# Altium PCB uCurrentRev5_B.PcbDoc
Units mm, origin at the board's own origin, x right, y up, seen from the top; angles counter-clockwise.
Board outline 38 x 36 mm, 2 copper layers (Top Layer, Bottom Layer); 4 components, 0 nets, 2 pads, 0 vias.
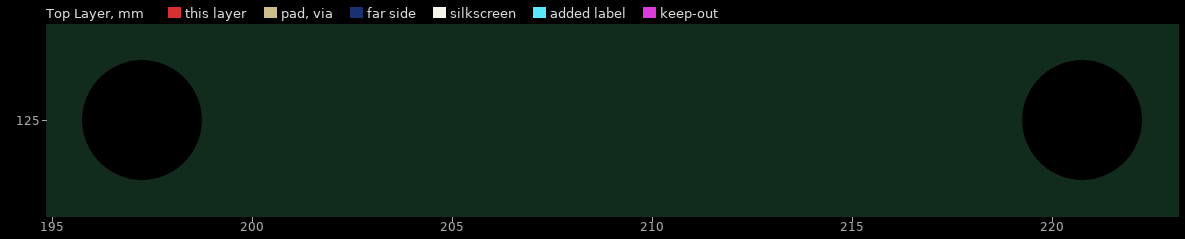
[diagram p0: Top Layer view]
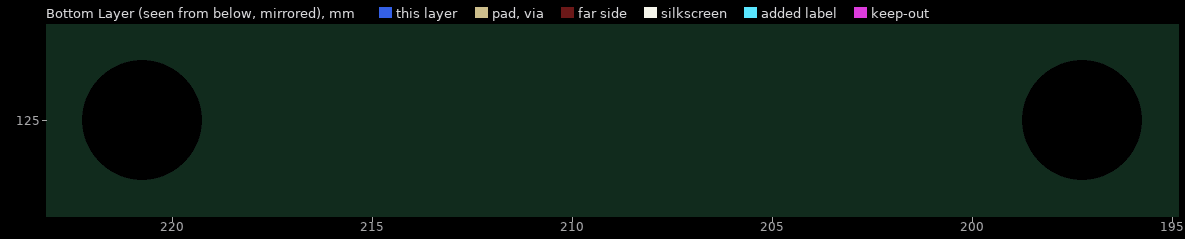
[diagram p1: Bottom Layer view, seen from below]

## Layer stack, top to bottom
Top Solder: solder mask 0.0102, Solder Resist, Dk 3.5
Top Layer: signal copper 0.0356
Dielectric1: dielectric 0.32, FR-4, Dk 4.8
Bottom Layer: signal copper 0.0356
Bottom Solder: solder mask 0.0102, Solder Resist, Dk 3.5

## Board outline
190,107 228,107 228,143 190,143

## Design rules (kind name [scope] priority, off if disabled: settings)
Clearance Clearance_3 [InNamedPolygon('Top Layer-No Net')] p1: gap=0.508
Clearance Clearance_2 [InNamedPolygon('Top Layer-No Net')] p2: gap=0.254
Clearance Clearance_1 [InNamedPolygon('Top Layer-No Net')] p3: gap=0.508
Clearance [All] p4: gap=0.635
FabricationTestPointUsage TestPointUsage [All] p1: valid=0 allowmultiple=FALSE
FabricationTestpoint Testpoint [All] p1: side=3 testpointundercomponent=TRUE minsize=1.016 maxsize=2.54 preferedsize=1.524 minholesize=0 maxholesize=1.016 preferedholesize=0.813 testpointgrid=0.025 allowsidetop=TRUE allowsidebottom=TRUE usegrid=TRUE gridtolerance=0
HoleSize [All] p1: absolutevalues=TRUE maxlimit=5 minlimit=0.025 maxpercent=80.000 minpercent=20.000
PolygonConnect [All] p1: connectstyle=Direct reliefconductorwidth=0.254 reliefentries=4 polygonreliefangle="90 Angle" airgapwidth=0.254
RoutingVias [All] p1: holewidth=0.4 width=0.8 viastyle="Through Hole" minholewidth=0.4 minwidth=0.8 maxholewidth=0.4 maxwidth=0.8
SilkToSolderMaskClearance SilkscreenOverComponentPads [IsPad] p1: minsilkscreentomaskgap=0.254 clearancetoexposedcopper=TRUE
SolderMaskExpansion [All] p1: expansion=0.051
Width [All] p1: maxlimit=3.81 minlimit=0.203 preferedwidth=0.381 minimp=50.000000 maximp=50.000000 favimp=50.000000
25 further rules are at their usual default settings.

## Components (designator, comment, footprint, x,y, rotation, side; value= is the part's Value field where it differs from the comment)
J1 "4mmBindingPostRed" PIN1 9.5,7 r0 top locked
J2 "4mmBindingPostBlack" PIN1 28.5,7 r0 top locked
J3 "4mmBindingPostRed" PIN1 9.5,56 r0 top locked
J4 "4mmBindingPostBlack" PIN1 28.5,56 r0 top locked

## Footprints (in the part's own frame and the unit in brackets; to place one, negate y for a bottom-side part, rotate by r counter-clockwise, add the part's x,y. Pads: shape width x height; smd on the part's side, far side on the other; paste and mask are expansions set on the pad)
PIN1 [mm] "Connector; Plug"

## Free pads (board coordinates)
  round 1.524 hole 3: 1(197.25,125) 2(220.75,125)

## Nets (pads, with @x,y where several pads share a name; then routed paths per layer and width w, separated by ;. In a path a pad name is that pad's centre, name@x,y a point inside that pad or via, vN(x,y) a via of type N, cw(c..) or ccw(c..) an arc to the next point about the centre after c; other vN are vias at no path point)

## Silkscreen, mask and mechanical layers (free items; w line width, h text height)
Mechanical 1:
  the board outline again, w0.127
Mechanical 16:
  lines w0.127: 58.944,72.131 64.024,72.131 ; 58.944,120.391 64.024,120.391 ; 58.944,168.651 64.024,168.651 ; 131.969,23.871 131.969,28.951 ; 131.969,211.831 131.969,216.911 ; 196.104,28.951 231.664,28.951 ; 204.994,23.871 204.994,28.951 ; 204.994,211.831 204.994,216.911 ; 226.051,28.976 226.076,28.951 ; 240.894,28.951 240.894,52.04 345.964,52.04 ; 240.919,44.521 345.939,44.521 ; 240.944,36.546 345.939,36.546 ; 259.874,28.951 259.874,36.546 ; 259.894,32.532 345.939,32.532 ; 278.019,211.831 278.019,216.911 ; 291.415,29.002 291.415,36.52 ; 320.344,36.546 320.344,52.04 ; 335.369,44.521 335.369,52.037 ; 345.964,72.131 351.044,72.131 ; 345.964,120.391 351.044,120.391 ; 345.964,168.651 351.044,168.651 ; 58.944,23.871 351.044,23.871 351.044,216.911 58.944,216.911 58.944,23.871 ; 64.024,28.951 64.024,211.831 345.964,211.831 345.964,54.224 345.964,28.951 64.024,28.951
  text "1" at 95.19,213.482 h1.78
  text "2" at 167.834,213.482 h1.78
  text "3" at 240.986,213.482 h1.78
  text "4" at 313.884,213.482 h1.78
  text "A" at 60.849,190.47 h1.78
  text "A" at 347.869,190.47 h1.78
  text "B" at 60.849,142.413 h1.78
  text "B" at 347.869,142.413 h1.78
  text "C" at 60.849,93.899 h1.78
  text "C" at 347.869,93.899 h1.78
  text "PROJECT NAME:" at 241.808,50.033 h1.14
  text "REVISION:" at 321.258,50.033 h1.14
  text "A4" at 338.719,46.962 h2.29
  text "BatteryHolderForuCurrentGOLD_B.PcbDoc" at 246.5,46.5 h2.54
  text "1.0.0" at 324.544,46.187 h1.78
  text "D" at 60.849,45.893 h1.78
  text "PROJECT NUMBER:" at 321.233,42.515 h1.14
  text "TITLE:" at 241.783,42.438 h1.14
  text "Battery Holder For uCurrent GOLD Board B" at 248.758,38.349 h2.16
  text "ONW-000" at 328.719,38.337 h1.78
  text "DATE:" at 241.91,34.336 h1.14
  text "Pawel Poryzala" at 309.678,33.852 h1.52
  text "1" at 271.097,33.777 h1.52
  text "DRAWN BY:" at 292.482,33.776 h1.52
  text "of" at 274.78,33.701 h1.52
  text "1" at 279.199,33.701 h1.52
  text "SHEET" at 261.318,33.675 h1.52
  text "20/03/2014" at 243.078,30.221 h1.52
  text "Pawel Poryzala" at 309.703,30.22 h1.52
  text "CHECKED BY:" at 292.456,30.093 h1.52
  text ".PCB_FILE_NAME_NO_PATH" at 261.216,30.069 h1.52
  text "1" at 95.19,25.522 h1.78
  text "2" at 167.834,25.522 h1.78

## Dimensions
190,143 to 228,143 on Top Overlay
190,143 to 190,107 on Top Overlay